# EAGLE board L298R (EAGLE 6.4)
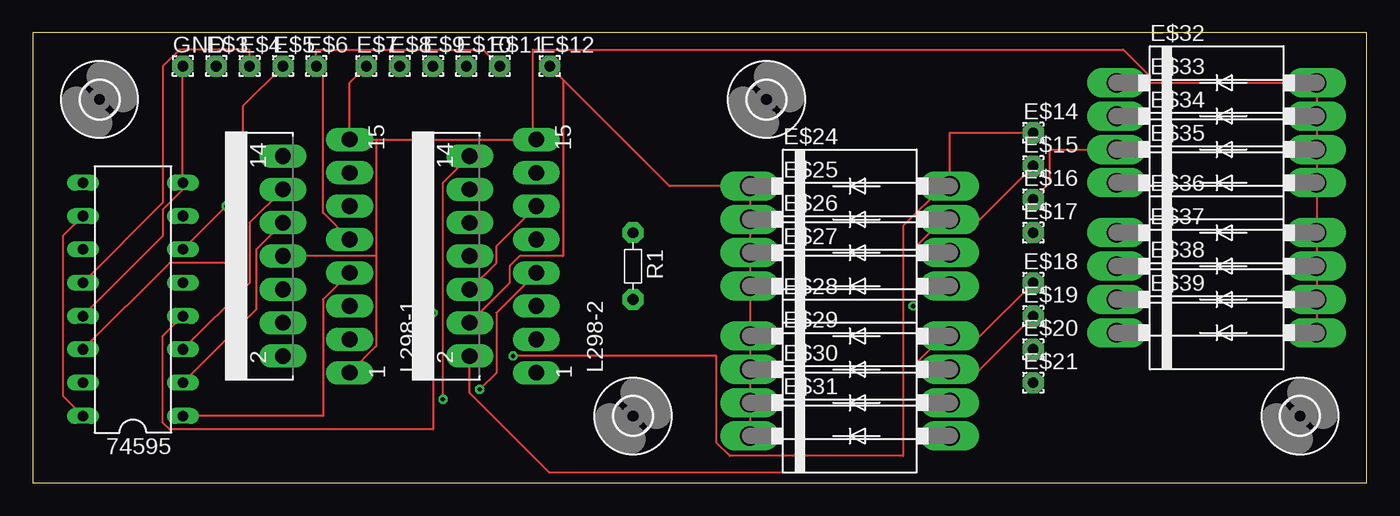
[diagram p0: board, top side]
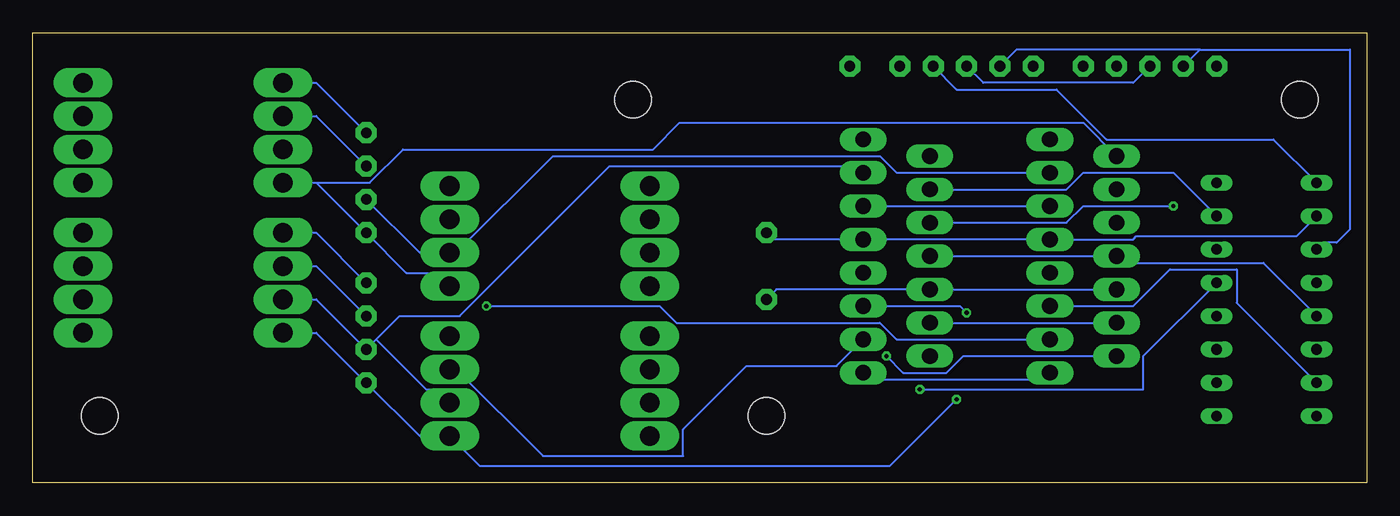
[diagram p1: board, bottom side, seen from below]

Size 101.6 x 34.29 mm. Coordinates in mm from the lower left corner, seen from the top.
Outline: 0,34.29 0,0 101.6,0 101.6,34.29 0,34.29
Copper layers (1*16): Top 0.0356mm / dielectric 1.5011mm / Bottom 0.0356mm
Design rules "LaenPCBOrder": minimum track width 6mil, minimum drill 13mil, track to track 6mil, track to pad 6mil, pad to pad 6mil, via to via 6mil, smd to smd 6mil, copper to edge 15mil, drill to drill 6mil, minimum pad ring 7mil, minimum via ring 7mil, stop-mask expansion 4mil, vias tented up to drill 0mil, thermal gap 10mil

## Footprints (pad centres in the part's own frame; a part is rotated, then mirrored left to right if it is on the bottom)
DIL16 = drill 0.813 long: 1 -8.89,-3.81; 2 -6.35,-3.81; 3 -3.81,-3.81; 4 -1.27,-3.81; 5 1.27,-3.81; 6 3.81,-3.81; 7 6.35,-3.81; 8 8.89,-3.81; 9 8.89,3.81; 10 6.35,3.81; 11 3.81,3.81; 12 1.27,3.81; 13 -1.27,3.81; 14 -3.81,3.81; 15 -6.35,3.81; 16 -8.89,3.81
2,8 = hole 2.8: 0,0
1,6/0,8 = drill 0.813 pad 1.6 octagon: 1 0,0
DO201-15 = drill 1.499 long: A 7.62,0; C -7.62,0
MULTIWATT-15 = drill 1.2 long: 1 -8.89,-7.62; 2 -7.62,-2.54; 3 -6.35,-7.62; 4 -5.08,-2.54; 5 -3.81,-7.62; 6 -2.54,-2.54; 7 -1.27,-7.62; 8 0,-2.54; 9 1.27,-7.62; 10 2.54,-2.54; 11 3.81,-7.62; 12 5.08,-2.54; 13 6.35,-7.62; 14 7.62,-2.54; 15 8.89,-7.62
R-5 = drill 0.813 pad 1.6 octagon: 1 -2.54,0; 2 2.54,0

## Placement (x,y rotation side)
74595  74595  [DIL16]  7.62,13.97 90 top
E$1  [2,8]  55.88,29.21 0 top
E$3  [1,6/0,8]  13.97,31.75 0 top
E$4  [1,6/0,8]  16.51,31.75 0 top
E$5  [1,6/0,8]  19.05,31.75 0 top
E$6  [1,6/0,8]  21.59,31.75 0 top
E$7  [1,6/0,8]  25.4,31.75 0 top
E$8  [1,6/0,8]  27.94,31.75 0 top
E$9  [1,6/0,8]  30.48,31.75 0 top
E$10  [1,6/0,8]  33.02,31.75 0 top
E$11  [1,6/0,8]  35.56,31.75 0 top
E$12  [1,6/0,8]  39.37,31.75 0 top
E$14  [1,6/0,8]  76.2,26.67 0 top
E$15  [1,6/0,8]  76.2,24.13 0 top
E$16  [1,6/0,8]  76.2,21.59 0 top
E$17  [1,6/0,8]  76.2,19.05 0 top
E$18  [1,6/0,8]  76.2,15.24 0 top
E$19  [1,6/0,8]  76.2,12.7 0 top
E$20  [1,6/0,8]  76.2,10.16 0 top
E$21  [1,6/0,8]  76.2,7.62 0 top
E$24  [DO201-15]  62.23,22.61 0 top
E$25  [DO201-15]  62.23,20.07 0 top
E$26  [DO201-15]  62.23,17.53 0 top
E$27  [DO201-15]  62.23,14.99 0 top
E$28  [DO201-15]  62.23,11.18 0 top
E$29  [DO201-15]  62.23,8.64 0 top
E$30  [DO201-15]  62.23,6.1 0 top
E$31  [DO201-15]  62.23,3.56 0 top
E$32  [DO201-15]  90.17,30.48 0 top
E$33  [DO201-15]  90.17,27.94 0 top
E$34  [DO201-15]  90.17,25.4 0 top
E$35  [DO201-15]  90.17,22.86 0 top
E$36  [DO201-15]  90.17,19.05 0 top
E$37  [DO201-15]  90.17,16.51 0 top
E$38  [DO201-15]  90.17,13.97 0 top
E$39  [DO201-15]  90.17,11.43 0 top
E$40  [2,8]  5.08,29.21 0 top
E$41  [2,8]  96.52,5.08 0 top
E$42  [2,8]  45.72,5.08 0 top
GND  [1,6/0,8]  11.43,31.75 0 top
L298-1  L298  [MULTIWATT-15]  16.51,17.27 90 top
L298-2  L298  [MULTIWATT-15]  30.73,17.27 90 top
R1  10K  [R-5]  45.72,16.51 270 top

## Library data of the parts
74595 = 74xx-us
E$1 E$40-E$42 = holes
E$3-E$12 E$14-E$21 GND = wirepad
E$24-E$39 = diode
L298-1 L298-2 = st-microelectronics
R1 = discrete

## Nets
S$1: 74595.8 74595.13 E$7.1 E$32.A E$33.A E$34.A E$35.A E$36.A E$37.A E$38.A E$39.A GND.1 L298-1.1 L298-1.8 L298-1.15 L298-2.1 L298-2.8 L298-2.15
S$2: 74595.10 74595.16 E$6.1 E$11.1 L298-1.9 L298-2.9 R1.1
S$3: 74595.11 E$3.1 E$8.1
S$4: 74595.12 E$4.1 E$9.1
S$5: 74595.14 E$5.1
S$6: 74595.9 E$10.1
S$7: E$14.1 E$24.A E$32.C L298-1.2
S$8: E$15.1 E$25.A E$33.C L298-1.3
S$9: E$12.1 E$24.C E$25.C E$26.C E$27.C E$28.C E$29.C E$30.C E$31.C L298-1.4 L298-2.4
S$10: 74595.15 L298-1.5
S$11: L298-1.6 L298-1.11 L298-2.6 L298-2.11 R1.2
S$12: 74595.1 L298-1.7
S$13: 74595.2 L298-1.10
S$14: 74595.3 L298-1.12
S$15: E$16.1 E$26.A E$34.C L298-1.13
S$16: E$17.1 E$27.A E$35.C L298-1.14
S$17: E$18.1 E$28.A E$36.C L298-2.2
S$18: E$19.1 E$29.A E$37.C L298-2.3
S$19: E$20.1 E$30.A E$38.C L298-2.13
S$20: E$21.1 E$31.A E$39.C L298-2.14
S$21: 74595.4 L298-2.5
S$22: 74595.5 L298-2.7
S$23: 74595.6 L298-2.10
S$24: 74595.7 L298-2.12

## Tracks (layer width: path | path; a pad name or v marks a point on that pad's centre or on a via)
S$1
  Top 0.152: 74595.13 9.91,18.8 9.91,20.83 11.43,22.35 74595.8 GND.1 | E$39.A E$38.A E$37.A E$36.A E$35.A E$34.A E$33.A E$32.A 85.09,30.48 85.09,30.99 83.06,33.02 38.1,33.02 38.1,26.16 | E$7.1 24.13,30.48 L298-1.15 26.16,26.16 | 26.16,26.16 38.1,26.16 | L298-1.1 26.16,10.41 26.16,17.27 | 26.16,26.16 26.16,17.27 | 26.16,17.27 L298-1.8 | 38.1,26.16 L298-2.15
  Bottom 0.152: L298-2.8 L298-1.8 18.54,16.76 7.87,16.76 74595.13 | L298-1.1 24.64,7.87 37.85,7.87 L298-2.1
S$2
  Top 0.152: 74595.16 2.29,6.6 2.29,18.8 74595.10 | L298-1.9 22.1,20.57 22.1,31.24 E$6.1 21.59,33.02 34.29,33.02 E$11.1
  Bottom 0.152: R1.1 45.21,18.54 L298-2.9 L298-1.9 17.78,18.54 17.53,18.8 5.33,18.8 74595.10
S$3
  Bottom 0.152: 74595.11 3.3,18.29 2.29,18.29 1.27,19.3 1.27,33.02 12.7,33.02 | E$3.1 12.7,33.02 | E$8.1 26.67,33.02 12.7,33.02
S$4
  Top 0.152: 74595.12 9.91,21.34 9.91,31.75 11.18,33.02 16.51,33.02 E$4.1
  Bottom 0.152: E$9.1 29.21,30.48 17.78,30.48 E$4.1
S$5
  Top 0.152: 74595.14 10.41,16.76 16,16.76 16,28.7 E$5.1
S$6
  Bottom 0.152: 74595.9 7.11,26.16 19.81,26.16 23.62,29.97 31.24,29.97 E$10.1
S$7  (via drill 0.33)
  Top 0.152: v36.58,9.65 52.07,9.65 52.07,3.05 53.09,2.03 66.29,2.03 66.29,19.56 69.34,22.61 E$24.A 69.85,26.67 E$14.1
  Bottom 0.152: E$14.1 80.01,30.48 E$32.C | L298-1.2 30.73,9.65 32,8.38 35.31,8.38 v36.58,9.65
S$8  (via drill 0.33)
  Top 0.152: v67.06,13.46 67.31,13.72 67.31,18.03 69.34,20.07 E$25.A 72.14,20.07 E$15.1
  Bottom 0.152: E$15.1 80.01,27.94 E$33.C | L298-1.3 35.81,10.92 37.08,12.19 52.58,12.19 53.85,13.46 v67.06,13.46
S$9
  Top 0.152: E$31.C E$30.C E$29.C E$28.C E$27.C E$26.C E$25.C E$24.C 48.51,22.61 40.39,30.73 | 40.39,30.73 E$12.1 | L298-2.4 36.32,15.24 36.32,16.51 37.08,17.27 40.39,17.27 40.39,30.73
  Bottom 0.152: L298-2.4 L298-1.4
S$10
  Bottom 0.152: 74595.15 9.91,13.72 9.91,16.26 14.99,16.26 17.78,13.46 L298-1.5
S$11
  Top 0.152: L298-2.11 35.31,18.03 35.31,16.76 L298-2.6
  Bottom 0.152: L298-2.11 L298-1.11 | R1.2 44.96,14.73 L298-2.6 L298-1.6
S$12
  Top 0.152: 74595.1 22.1,5.08 22.1,13.97 L298-1.7
S$13
  Top 0.152: 74595.2 17.02,13.21 17.02,17.78 L298-1.10
S$14
  Top 0.152: 74595.3 16.51,15.24 16.51,19.81 L298-1.12
S$15
  Top 0.152: E$34.C 77.47,25.4 77.47,22.86 E$16.1
  Bottom 0.152: E$16.1 72.14,17.53 E$26.A 69.34,17.53 61.98,24.89 37.08,24.89 35.81,23.62 L298-1.13
S$16
  Bottom 0.152: 80.01,22.86 E$17.1 73.15,16 70.87,16 E$27.A | E$35.C 80.01,22.86 | L298-1.14 21.59,27.43 52.32,27.43 54.36,25.4 73.41,25.4 75.95,22.86 80.01,22.86
S$17
  Top 0.152: L298-2.2 33.27,6.86 39.37,0.76 67.31,0.76 67.31,9.14 69.34,11.18 E$28.A 72.14,11.18 E$18.1
  Bottom 0.152: E$18.1 80.01,19.05 E$36.C
S$18
  Top 0.152: E$19.1 72.14,8.64 E$29.A
  Bottom 0.152: E$19.1 80.01,16.51 E$37.C | L298-2.3 40.39,8.89 47.24,8.89 52.07,4.06 52.07,2.03 62.74,2.03 69.34,8.64 E$29.A
S$19
  Bottom 0.152: E$38.C 80.01,13.97 E$20.1 75.44,10.92 | L298-2.13 38.86,24.13 57.66,24.13 69.09,12.7 73.66,12.7 75.44,10.92 | E$30.A 70.87,7.11 71.63,7.11 75.44,10.92
S$20  (via drill 0.33)
  Top 0.152: L298-2.14 31.24,22.86 v31.24,6.35
  Bottom 0.152: E$39.C 80.01,11.43 E$21.1 72.14,3.56 E$31.A 67.56,1.27 36.32,1.27 v31.24,6.35
S$21  (via drill 0.33)
  Top 0.152: 74595.4 9.91,11.18 9.91,4.57 10.41,4.06 30.48,4.06 v30.48,12.95
  Bottom 0.152: v30.48,12.95 30.99,13.46 L298-2.5
S$22  (via drill 0.33)
  Top 0.152: v34.04,7.11 35.31,8.38 35.31,12.95 L298-2.7
  Bottom 0.152: 74595.5 17.02,9.65 17.02,7.11 v34.04,7.11
S$23  (via drill 0.33)
  Top 0.152: v14.73,21.08 74595.6
  Bottom 0.152: v14.73,21.08 21.59,21.08 22.86,19.81 L298-2.10
S$24
  Bottom 0.152: 74595.7 14.73,23.62 21.59,23.62 22.86,22.35 L298-2.12

## Text on the board
tNames: GND | SHCP | STCP | DS | +5V | GND | SHCP | STCP | DS | +5V | +12V | O11 | O12 | O13 | O14 | O21 | O22 | O23 | O24